# Altium PCB miniGatewayV3.PcbDoc
Units mm, origin at the board's own origin, x right, y up, seen from the top; angles counter-clockwise.
Board outline 152.4 x 101.6 mm, 2 copper layers (Top Layer, Bottom Layer); 17 components, 32 nets, 130 pads, 17 vias.
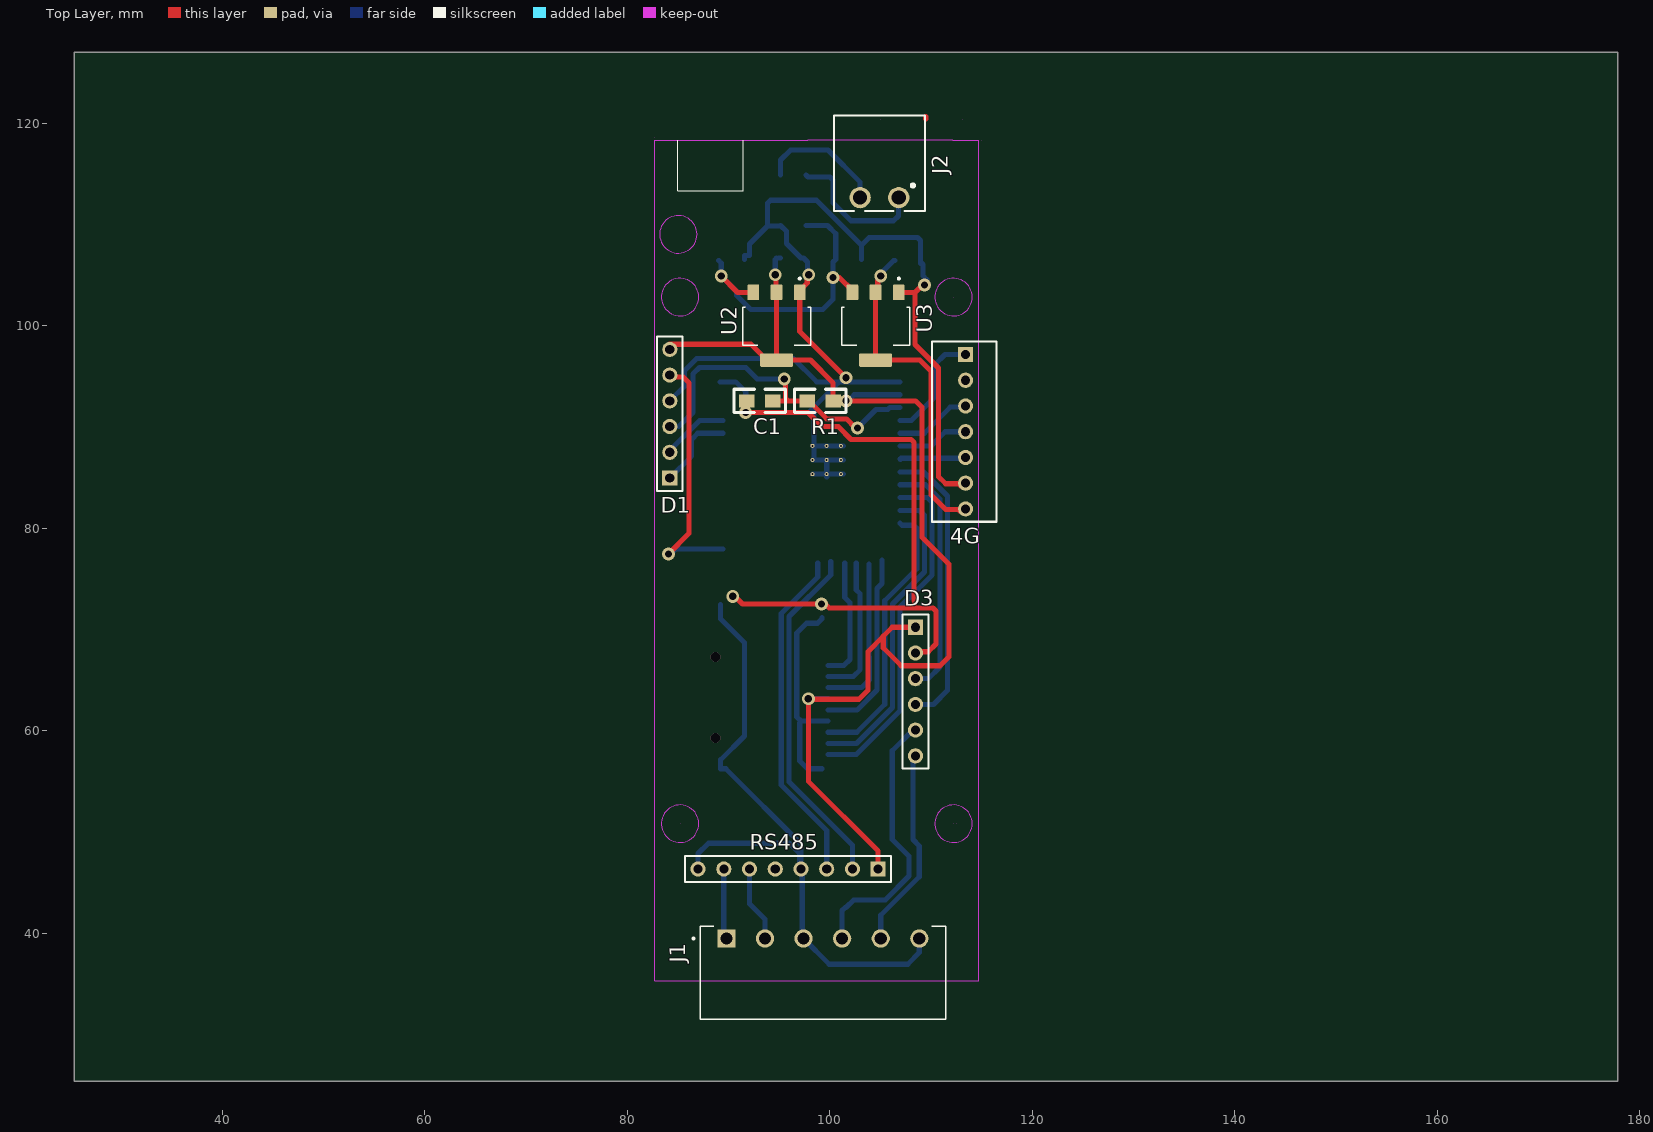
[diagram p0: Top Layer view]
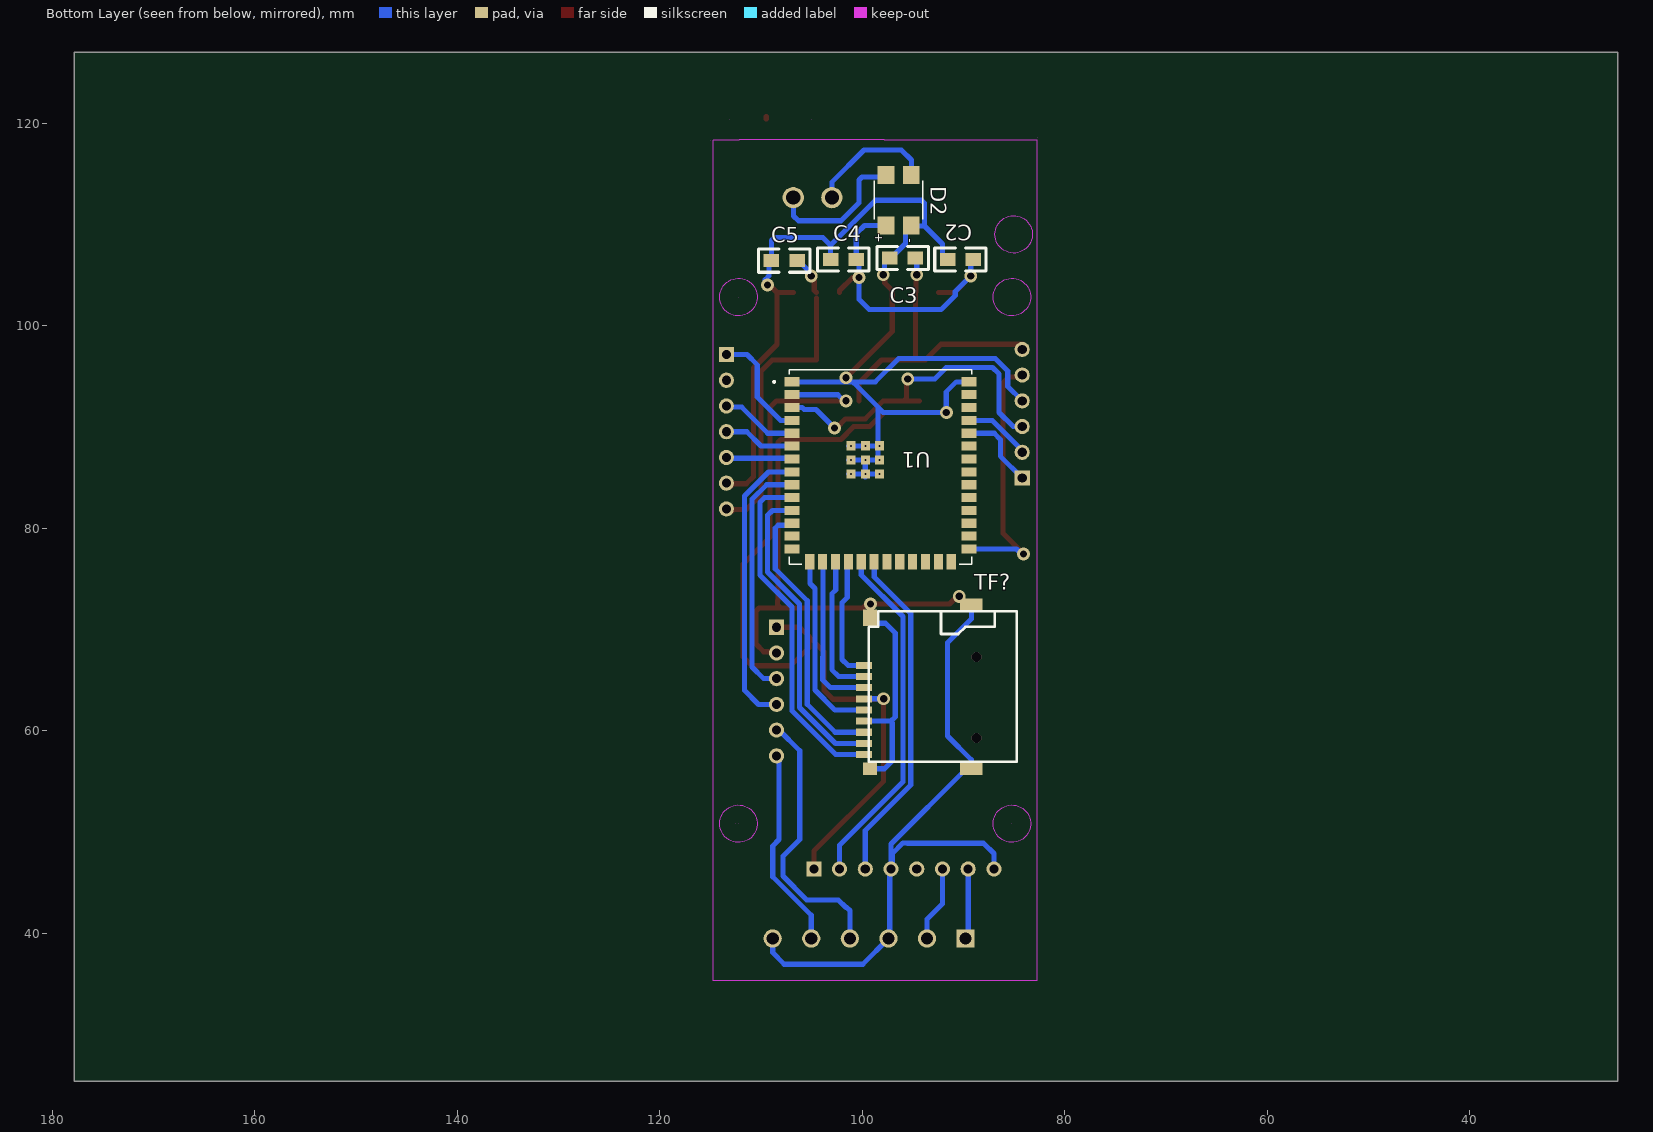
[diagram p1: Bottom Layer view, seen from below]

## Layer stack, top to bottom
Top Solder: solder mask 0.0102, Solder Resist, Dk 3.5
Top Layer: signal copper 0.0356
Dielectric 1: dielectric 0.32, FR-4, Dk 4.8
Bottom Layer: signal copper 0.0356
Bottom Solder: solder mask 0.0102, Solder Resist, Dk 3.5

## Board outline
25.4,25.4 177.8,25.4 177.8,127 25.4,127

## Design rules (kind name [scope] priority, off if disabled: settings)
Clearance [All] p1: gap=0.254 ignorepadtopadclearanceinfootprint=FALSE except(0: Arc-Hole Track-Hole SMDPad-Hole THPad-Hole Via-Hole Fill-Hole Poly-Hole Region-Hole Text-Hole)
PolygonConnect [All] p1: connectstyle=Relief reliefconductorwidth=0.254 reliefentries=4 polygonreliefangle="90 Angle" airgapwidth=0.254
RoutingVias [All] p1: holewidth=0.711 width=1.27 viastyle="Through Hole" minholewidth=0.711 minwidth=1.27 maxholewidth=0.711 maxwidth=1.27
SolderMaskExpansion [All] p1: expansion=0.102 istentingtop=FALSE
Width [All] p1: maxlimit=0.508 minlimit=0.508 preferedwidth=0.508
30 further rules are at their usual default settings.

## Components (designator, comment, footprint, x,y, rotation, side; value= is the part's Value field where it differs from the comment)
4G "DS1307模块" DS1307 113.411,97.155 r270 top
C1 "100pf" 0805 91.821,92.583 r180 top value=100pF
C2 "100pf" 0805 91.567,106.553 r0 bottom value=100pF
C3 "100pf" 0805 97.282,106.68 r0 bottom value=100pF
C4 "100pf" 0805 103.124,106.553 r0 bottom value=100pF
C5 "100pf" 0805 108.966,106.426 r0 bottom value=100pF
D1 "2.54DIP6" HDR1X6 84.201,84.963 r90 top
D2 "HD06-T" DQ 96.393,112.268 r90 bottom
D3 "2.54DIP6" HDR1X6 108.458,70.231 r270 top
J1 "1803316" 6PIN3.81mm 98.806,38.1 r0 top
J2 "691322310002" 691322310002 104.902,112.649 r180 top
R1 "10K" 0805 100.33,92.583 r0 top
RS485 "Header 8" HDR1X8 104.775,46.355 r180 top
TF? "TF_CARD" TF_SOCKET-1 96.422,58.462 r90 bottom
U1 "ESP32-S3-WROOM-1U" ESP32-S3-WROOM 99.716,86.689 r180 bottom
U2 "AMS1117-3.3" SOT229P700X180-4N 94.742,99.949 r270 top
U3 "AMS1117-5" SOT229P700X180-4N 104.521,99.949 r270 top

## Footprints (in the part's own frame and the unit in brackets; to place one, negate y for a bottom-side part, rotate by r counter-clockwise, add the part's x,y. Pads: shape width x height; smd on the part's side, far side on the other; paste and mask are expansions set on the pad)
6PIN3.81mm [mm]
  rect 1.8x1.8 hole 1.2: 1(-9.017,1.397)
  round 1.8 hole 1.2: 2(-5.207,1.397) 3(-1.397,1.397) 4(2.413,1.397) 5(6.223,1.397) 6(10.033,1.397)
  silkscreen extent -12.37,-6.6 12.63,2.6
0805 [mil]
  rect 60x50 smd: 1(0,0) 2(-100,0)
  silkscreen extent -150,-45 50,45
691322310002 [mm]
  round 2.1 hole 1.4: 1(-1.905,0) 2(1.905,0)
  silkscreen extent -4.5,-8.1 4.5,1.3
DQ [mm]
  rect 1.8x1.65 smd: AC1(2.627,1.25) AC2(2.627,-1.25) NEG(-2.373,-1.25) POS(-2.373,1.25)
  silkscreen extent -1.77,-2.39 2.03,2.39, body extent -3.27,-2.35 3.53,2.35, height 3
DS1307 [mm] "Connector; Header; 7 Position"
  rect 1.5x1.5 hole 0.9: 1(0,0)
  round 1.5 hole 0.9: 2(2.54,0) 3(5.08,0) 4(7.62,0) 5(10.16,0) 6(12.7,0) 7(15.24,0)
  silkscreen extent -1.27,-3.3 16.51,3.05
ESP32-S3-WROOM [mm]
  rect 1.5x0.9 smd: 1(-7.226,7.775) 2(-7.226,6.505) 3(-7.226,5.235) 4(-7.226,3.965) 5(-7.226,2.695) 6(-7.226,1.425) 7(-7.226,0.155) 8(-7.226,-1.115) 9(-7.226,-2.385) 10(-7.226,-3.655) 11(-7.226,-4.925) 12(-7.226,-6.195) 13(-7.226,-7.465) 14(-7.226,-8.735) 27(10.274,-8.735) 28(10.274,-7.465) 29(10.274,-6.195) 30(10.274,-4.925) 31(10.274,-3.655) 32(10.274,-2.385) 33(10.274,-1.115) 34(10.274,0.155) 35(10.274,1.425) 36(10.274,2.695) 37(10.274,3.965) 38(10.274,5.235) 39(10.274,6.505) 40(10.274,7.775)
  rect 0.9x1.5 smd: 15(-5.461,-9.985) 16(-4.191,-9.985) 17(-2.921,-9.985) 18(-1.651,-9.985) 19(-0.381,-9.985) 20(0.889,-9.985) 21(2.159,-9.985) 22(3.429,-9.985) 23(4.699,-9.985) 24(5.969,-9.985) 25(7.239,-9.985) 26(8.509,-9.985)
  rect 0.9x0.9 smd: 41_1(-1.376,1.455) 41_2(0.024,1.455) 41_3(1.424,1.455) 41_4(-1.376,0.055) 41_5(0.024,0.055) 41_6(1.424,0.055) 41_7(-1.376,-1.345) 41_8(0.024,-1.345) 41_9(1.424,-1.345)
  round 0.4 hole 0.2 mask+0: 41_10(-1.376,1.455) 41_11(0.024,1.455) 41_12(-1.376,0.055) 41_13(0.024,0.055) 41_14(1.424,1.455) 41_16(1.424,0.055) 41_17(-1.376,-1.345) 41_18(0.024,-1.345) 41_19(1.424,-1.345)
  silkscreen extent -9.08,-10.24 10.52,8.96
HDR1X6 [mm] "Connector; Header; 6 Position"
  rect 1.5x1.5 hole 0.9: 1(0,0)
  round 1.5 hole 0.9: 2(2.54,0) 3(5.08,0) 4(7.62,0) 5(10.16,0) 6(12.7,0)
  silkscreen extent -1.27,-1.27 13.97,1.27
HDR1X8 [mm] "Connector; Header; 8 Position"
  rect 1.5x1.5 hole 0.9: 1(0,0)
  round 1.5 hole 0.9: 2(2.54,0) 3(5.08,0) 4(7.62,0) 5(10.16,0) 6(12.7,0) 7(15.24,0) 8(17.78,0)
  silkscreen extent -1.27,-1.27 19.05,1.27
SOT229P700X180-4N [mm]
  rrect15% 1.539x1.147 smd: 1(-3.345,2.29)
  rrect15% 1.539x1.159 smd: 2(-3.345,0) 3(-3.345,-2.29)
  rrect15% 1.31x3.24 smd: 4(3.345,0)
  silkscreen extent -4.8,-3.36 1.86,3.36, body extent -3.5,-3.25 3.5,3.25, height 1.8
TF_SOCKET-1 [mm]
  rect 0.7x1.6 smd: 1(8,3.4) 2(6.9,3.4) 3(5.8,3.4) 4(4.7,3.4) 5(3.6,3.4) 6(2.5,3.4) 7(1.4,3.4) 8(0.3,3.4) 9(-0.8,3.4)
  rect 1.6x1.4 smd: 10(12.7,2.8)
  rect 1.2x2.2 smd: 11(14,-7.2) 13(-2.2,-7.2)
  rect 1.2x1.4 smd: 12(-2.2,2.8)
  silkscreen extent -1.52,-11.68 13.33,2.92, body extent -2.22,-11.56 13.78,3.69, height 1.85

## Part data
4G: library part "Header 7", "Header, 7-Pin", LatestRevisionDate=17-Jul-2002, LatestRevisionNote="Re-released for DXP Platform.", Publisher="Altium Limited"
C1 C2 C3 C4 C5: library part "Cap Semi", "Capacitor (Semiconductor SIM Model)", LatestRevisionDate=29-May-2009, LatestRevisionNote="IPC-7351 Footprint Added.", PackageDescription="Chip Capacitor", PackageReference=C1206, Published=8-Jun-2000, Publisher="Altium Limited"
D1 D3: library part "Header 6", "Header, 6-Pin", LatestRevisionDate=17-Jul-2002, LatestRevisionNote="Re-released for DXP Platform.", Publisher="Altium Limited"
D2: "KÃ¶prÃ¼ DoÄŸrultucu Tek FazlÄ± Standart 600 V YÃ¼zey MontajlÄ± 4-MiniDIP", Package="SMD-4 Diodes Inc.", Availability="In Stock", Check_prices=https://www.snapeda.com/parts/HD06-T/Diodes+Inc./view-part/?ref=eda, MF="Diodes Inc.", MP=HD06-T, Price=None, Purchase-URL=https://pricing.snapeda.com/search/part/HD06-T/?ref=eda, SnapEDA_Link=https://www.snapeda.com/parts/HD06-T/Diodes+Inc./view-part/?ref=snap
J1: "6 Position Terminal Block Header, Male Pins, Shrouded _4 Side_ 0.150 _3.81mm_ 90Â°, Right Angle Through Hole", Package=None, Availability=Unavailable, MF="Phoenix Contact", MP=1803316, Price=None, SnapEDA_Link=https://www.snapeda.com/parts/1803316/Phoenix%20Contact/view-part/681506/?ref=snap
J2: "2 Position Terminal Block Header, Male Pins, Shrouded (4 Side) 0.150 (3.81mm) 90Â°, Right Angle - Through Hole", Package=None, Check_prices=https://www.snapeda.com/parts/691322310002/Wurth+Electronics+Inc./view-part/?ref=eda, MF="Wurth Electronics", MP=691322310002, SnapEDA_Link=https://www.snapeda.com/parts/691322310002/Wurth+Electronics+Inc./view-part/?ref=snap
R1: library part Res3, "Resistor", LatestRevisionDate=29-May-2009, LatestRevisionNote="IPC-7351 Footprint Added.", PackageDescription="Chip Resistor", PackageReference=J1-0603, Published=8-Jun-2000, Publisher="Altium Limited"
RS485: "Header, 8-Pin", LatestRevisionDate=17-Jul-2002, LatestRevisionNote="Re-released for DXP Platform.", Publisher="Altium Limited"
U1: "2.4 GHz Wi-Fi (802.11 b/g/n) and Bluetooth 5 (LE) module", Package=Package, Availability="Not in stock", Check_prices=https://www.snapeda.com/parts/ESP32-S3-WROOM-1U/Espressif+Systems/view-part/?ref=eda, MF="Espressif Systems", MP=ESP32-S3-WROOM-1U, Price=None, SnapEDA_Link=https://www.snapeda.com/parts/ESP32-S3-WROOM-1U/Espressif+Systems/view-part/?ref=snap
U2 U3: library part AMS1117, "1A LOW DROPOUT VOLTAGE REGULATOR SOT-223", Package="SOT-223 Seeed Technology", Availability="Not in stock", Check_prices=https://www.snapeda.com/parts/AMS1117/Advanced+Monolithic+Systems/view-part/?ref=eda, MF="Advanced Monolithic Systems", MP=AMS1117, Price=None, SnapEDA_Link=https://www.snapeda.com/parts/AMS1117/Advanced+Monolithic+Systems/view-part/?ref=snap

## Via types
v1: diameter 1.27, hole 0.711, Top Layer to Bottom Layer, 15 vias
v2: diameter 1, hole 1, Top Layer to Bottom Layer, 2 vias

## Nets (pads, with @x,y where several pads share a name; then routed paths per layer and width w, separated by ;. In a path a pad name is that pad's centre, name@x,y a point inside that pad or via, vN(x,y) a via of type N, cw(c..) or ccw(c..) an arc to the next point about the centre after c; other vN are vias at no path point)
4GRST: 4G.3 U1.5 | length 7.6
  Bottom Layer w0.508: U1.5@106.942,89.381 109.32,89.381 111.899,91.96 113.296,91.96 4G.3
4GRXD: 4G.4 U1.6 | length 7.1
  Bottom Layer w0.508: U1.6@106.942,88.111 109.982,88.111 111.406,89.535 4G.4
4GTXD: 4G.5 U1.7 | length 6.6
  Bottom Layer w0.508: U1.7@106.942,86.841 U1.7@106.992,86.791 ; U1.7 107.017,86.92 113.336,86.92 4G.5
12V+: D2.AC2 J2.2 | length 13.2
  Top Layer w0.508: J2.2@102.709,112.937 J2.2 J2.2@102.867,112.519
  Bottom Layer w0.508: D2.AC2 95.143,116.352 96.139,117.348 99.822,117.348 102.997,114.173 J2.2
12V-: D2.AC1 J2.1 | length 14.8
  Bottom Layer w0.508: D2.AC1 97.857,114.681 100.028,114.681 100.326,114.383 100.326,112.137 102.1,110.363 106.299,110.363 106.773,110.837 106.773,112.615 J2.1 J2.1@106.519,112.937
CANH: D3.5 J1.4 | length 26.7
  Bottom Layer w0.508: J1.4 101.219,42.247 101.517,42.545 101.6,42.545 102.362,43.307 105.475,43.307 107.823,45.655 107.823,47.625 106.172,49.276 106.172,58.039 D3.5@108.204,60.071
CANL: D3.6 J1.5 | length 19.9
  Bottom Layer w0.508: J1.5 105.029,41.783 108.839,45.593 108.839,48.641 108.204,49.276 D3.6@108.204,57.531
CRX: D3.4 U1.8 | length 28.9
  Bottom Layer w0.508: U1.8@106.942,85.571 109.243,85.571 111.633,83.181 111.633,64.008 110.236,62.611 D3.4 D3.4@108.204,62.611
CTX: D3.3 U1.9 | length 24.2
  Bottom Layer w0.508: U1.9@106.942,84.301 109.436,84.301 110.871,82.866 110.871,66.294 109.728,65.151 D3.3 D3.3@108.204,65.151
DTR: 4G.1 U1.4 | length 11
  Bottom Layer w0.508: U1.4@106.942,90.651 108.05,90.651 110.363,92.964 110.363,96.139 111.379,97.155 4G.1
EN: C1.2 D1.3 R1.2 U1.3 | length 33.3
  Top Layer w0.508: C1.2 95.885,92.583 ; v1(95.504,94.742) 95.631,94.615 95.631,92.837 95.885,92.583 ; v1(102.743,89.916) 102.545,89.916 101.656,90.805 99.695,90.805 97.917,92.583 R1.2 95.885,92.583
  Bottom Layer w0.508: D1.3 85.09,90.043 86.487,91.44 86.487,95.25 87.122,95.885 91.694,95.885 92.837,94.742 v1(95.504,94.742) ; v1(102.743,89.916) 104.552,91.725 105.73,91.725 105.929,91.924 U1.3
GND: 4G.6 C1.1 C2.1 C3.1 C4.1 C5.1 D1.4 D2.NEG D3.2 J1.3 J1.6 RS485.4 RS485.8 TF?.6 TF?.10 TF?.11 TF?.12 TF?.13 U1.1 U1.40 U1.41_1 U1.41_2 U1.41_3 U1.41_4 U1.41_5 U1.41_6 U1.41_7 U1.41_8 U1.41_9 U2.1 U3.1 | length 280.5
  Top Layer w0.508: v1(90.424,73.279) 90.63,73.279 91.392,72.517 v1(99.187,72.517) ; v1(91.694,91.44) 97.851,91.44 99.251,90.04 100.838,90.04 102.105,88.773 108.033,88.773 108.331,88.475 108.331,72.898 108.375,72.854 108.375,72.434 108.077,72.136 ; v1(97.917,105.029) 97.771,104.883 97.771,104.223 97.032,103.484 U2.1 97.032,99.437 v1(101.6,94.869) v1@101.6,94.615 ; v1@99.377,72.707 99.949,72.136 108.077,72.136 ; U3.1 108.422,103.294 ; D3.2@108.204,67.691 108.319,67.806 109.716,67.806 110.49,68.58 110.49,71.838 110.192,72.136 108.077,72.136 ; v1(109.347,104.013) 109.141,104.013 108.422,103.294 ; 4G.6@112.903,84.201 112.713,84.391 111.443,84.391 110.744,85.09 110.744,95.82 108.422,98.142 108.422,103.294
  Bottom Layer w0.508: D1.4 85.629,94.011 85.629,95.535 86.868,96.774 96.393,96.774 98.706,94.461 U1.1@106.942,94.461 ; RS485.8 86.995,47.879 88.011,48.895 95.504,48.895 95.548,48.939 95.968,48.939 97.04,47.867 97.04,46.47 RS485.4 ; U1.40@89.154,94.461 90.705,94.461 91.694,93.472 v1(91.694,91.44) 97.917,91.44 98.425,91.948 ; TF?.11 89.222,71.052 91.567,68.707 91.567,59.495 89.222,57.15 TF?.13 89.722,56.262 97.155,48.829 RS485.4 ; C2.1 91.567,106.934 92.075,106.934 92.075,108.077 93.853,109.855 ; 97.028,60.75 97.028,57.023 97.789,56.262 TF?.12 ; v1(97.917,105.029) 97.79,105.156 97.79,106.299 97.409,106.68 C3.1 97.155,106.68 95.714,108.121 95.714,109.324 D2.NEG 95.103,109.855 93.853,109.855 ; U1.41_9 U1.41_8 U1.41_8@99.695,85.344 ; U1.41_6@98.292,86.741 U1.41_5@99.695,86.741 ; U1.41_3@98.292,88.138 U1.41_3@98.425,88.138 ; U1.41_6@98.425,86.992 U1.41_3@98.425,88.138 ; 98.425,88.646 U1.41_3@98.425,88.138 ; 98.425,88.852 98.425,91.948 ; TF?.10 99.222,71.062 98.776,70.616 97.707,70.616 96.737,69.646 96.737,61.378 97.153,60.962 TF?.6 ; U1.41_8@99.695,85.087 U1.41_8@99.695,85.344 ; 100.838,94.361 98.425,91.948 ; U1.41_7@101.346,85.344 U1.41_7 U1.41_8@99.695,85.344 ; U1.41_4@101.346,86.741 U1.41_5@99.695,86.741 ; U1.41_1@101.346,88.138 U1.41_3@98.425,88.138 ; C4.1 103.124,107.95 ; J1.6 108.839,38.1 107.696,36.957 99.949,36.957 J1.3 97.282,39.624 97.282,46.228 RS485.4 ; v1@109.582,104.54 109.22,104.902 109.22,106.045 109.093,106.172 108.966,106.172 C5.1 108.966,108.414 108.668,108.712 103.886,108.712 103.124,107.95 ; 93.853,109.855 93.853,112.097 94.151,112.395 98.679,112.395 103.124,107.95 ; U1.41_8@99.695,85.344 U1.41_5@99.695,86.741
IO0: D1.5 U1.27 | length 25.5
  Top Layer w0.508: v1(84.074,77.47) 86.106,79.502 86.106,94.361 85.534,94.933 84.391,94.933 D1.5
  Bottom Layer w0.508: v1(84.074,77.47) 84.28,77.47 84.761,77.951 89.439,77.951 U1.27
NET: 4G.2
RS485A1: J1.1 RS485.7 | length 7
  Bottom Layer w0.508: RS485.7 89.535,39.751 J1.1
RS485B1: J1.2 RS485.6 | length 7.5
  Bottom Layer w0.508: RS485.6 92.075,42.926 93.599,41.402 J1.2
RX1: RS485.3 U1.20 | length 33.6
  Bottom Layer w0.508: U1.20@98.806,76.585 98.806,75.184 95.213,71.591 95.213,54.647 99.695,50.165 RS485.3
RXD0: D1.1 U1.36 | length 8
  Bottom Layer w0.508: D1.1 86.36,87.122 86.36,88.773 86.968,89.381 89.439,89.381 U1.36
SPI_CLK: TF?.5 U1.15 | length 18.7
  Bottom Layer w0.508: TF?.5 102.702,62.062 104.66,64.02 104.66,74.053 105.156,74.549 U1.15@105.156,76.842
SPI_SDCDN: TF?.9 U1.10 | length 34.2
  Bottom Layer w0.508: TF?.9 102.62,57.662 106.946,61.988 106.946,72.213 110.109,75.376 110.109,82.55 109.628,83.031 U1.10@106.942,83.031
SPI_SDCS: TF?.2 U1.17 | length 14.2
  Bottom Layer w0.508: TF?.2 102.319,65.362 102.997,66.04 102.997,73.533 102.616,73.914 U1.17@102.616,76.581
SPI_SDD1: TF?.8 U1.11 | length 30.7
  Bottom Layer w0.508: TF?.8 102.642,58.762 106.184,62.304 106.184,72.529 109.347,75.692 109.347,81.28 108.866,81.761 U1.11@106.942,81.761
SPI_SDD2: TF?.1 U1.18 | length 12.1
  Bottom Layer w0.508: TF?.1 101.387,66.462 101.981,67.056 101.981,72.644 101.473,73.152 U1.18@101.473,76.549
SPI_SDDI: TF?.3 U1.16 | length 15.8
  Bottom Layer w0.508: TF?.3 103.136,64.262 103.898,65.024 103.898,67.277 103.886,67.289 U1.16@103.886,76.454
SPI_SDDO: TF?.7 U1.12 | length 27.3
  Bottom Layer w0.508: TF?.7 102.665,59.862 105.422,62.619 105.422,72.845 108.585,76.008 108.585,80 108.287,80.298 107.138,80.298 U1.12
TX1: RS485.2 U1.19 | length 34.6
  Bottom Layer w0.508: U1.19 100.097,75.397 95.975,71.275 95.975,54.963 102.235,48.703 RS485.2
TXD0: D1.2 U1.37 | length 6.7
  Bottom Layer w0.508: D1.2 84.201,87.692 87.16,90.651 89.439,90.651 U1.37
USB_D+: U1.13
USB_D-: U1.14
VCC: C2.2 C4.2 D2.POS U2.3 U3.3 | length 30.8
  Top Layer w0.508: v1(89.283,104.904) 90.893,103.294 U2.3 ; v1@100.584,104.775 100.94,104.775 102.231,103.484 U3.3
  Bottom Layer w0.508: C2.2@89.029,106.428 89.283,106.174 v1(89.283,104.904) 90.815,103.372 90.815,102.987 92.202,101.6 99.314,101.6 100.33,102.616 v1(100.33,104.775) 100.33,106.299 C4.2 100.584,109.093 99.782,109.895 D2.POS
VCC50: 4G.7 C5.2 U3.2 U3.4 | length 31.9
  Top Layer w0.508: U3.2@104.521,102.75 U3.4 108.882,96.604 109.982,95.504 109.982,83.312 111.443,81.851 112.713,81.851 4G.7@112.903,81.661 ; U3.2 104.732,103.505 104.732,104.399 105.029,104.696 v1(105.029,104.902)
  Bottom Layer w0.508: v1(105.029,104.902) 105.175,105.048 105.175,105.302 106.299,106.426 C5.2
VDD33: C3.2 D1.6 D3.1 R1.1 RS485.1 TF?.4 U1.2 U2.2 U2.4 | length 114.7
  Top Layer w0.508: D1.6@84.201,98.171 92.21,98.171 93.777,96.604 U2.4 ; v1(94.615,105.029) 94.678,104.965 94.678,103.357 U2.2 U2.4 ; R1.1 100.33,94.361 98.087,96.604 U2.4 ; v1(101.6,92.583) 108.458,92.583 109.093,91.948 109.093,79.121 111.76,76.454 111.76,67.31 110.883,66.433 107.049,66.433 105.283,68.199 105.283,69.342 ; RS485.1 104.775,48.133 97.88,55.028 v1(97.88,63.162) 97.923,63.119 102.87,63.119 103.759,64.008 103.759,67.818 105.283,69.342 ; D3.1@108.204,70.231 106.172,70.231 105.283,69.342
  Bottom Layer w0.508: v1(94.615,105.029) 94.615,106.553 C3.2 ; C3.2@94.996,106.68 C3.2@95.123,106.68 ; v1(97.88,63.162) TF?.4 ; v1(101.6,92.583) 101.806,92.583 102.414,93.191 U1.2@106.942,93.191
pads on no net: RS485.5 U1.21 U1.22 U1.23 U1.24 U1.25 U1.26 U1.28 U1.29 U1.30 U1.31 U1.32 U1.33 U1.34 U1.35 U1.38 U1.39 U1.41_10 U1.41_11 U1.41_12 U1.41_13 U1.41_14 U1.41_16 U1.41_17 U1.41_18 U1.41_19
copper on no net: | length 0.3
  Top Layer w0.508: 109.474,120.396 109.474,120.65
  other v2: 88.713,59.3 88.713,67.3

## Keep-outs
Keep-Out Layer:
  circle w0.013: c85.04,109.022 r1.85
  circle w0.006: c86.599,108.027 r0.003
  circle w0.006: c84.348,49.201 r0.003
  circle w0.006: c114.006,103.322 r0.003
  circle w0.006: c86.781,101.836 r0.003
  circle w0.006: c113.122,120.331 r0.003
  circle w0.006: c115.022,118.331 r0.003
  circle w0.006: c82.722,118.631 r0.003
  circle w0.006: c104.972,120.331 r0.003
  circle w0.006: c82.722,118.331 r0.003
  circle w0.006: c112.222,50.831 r0.003
  circle w0.006: c85.222,50.831 r0.003
  circle w0.006: c114.722,118.331 r0.003
  circle w0.006: c112.222,102.831 r0.003
  circle w0.006: c114.722,35.331 r0.003
  circle w0.006: c112.522,50.831 r0.003
  circle w0.006: c112.222,102.831 r0.003
  circle w0.006: c112.222,50.831 r0.003
  circle w0.006: c114.722,118.331 r0.003
  circle w0.006: c82.722,118.331 r0.003
  circle w0.013: c112.222,102.831 r1.85
  circle w0.013: c85.222,102.831 r1.85
  circle w0.013: c85.222,50.831 r1.85
  circle w0.013: c112.222,50.831 r1.85
  lines w0.013: 84.472,118.331 82.722,118.331 ; 85.852,35.306 111.633,35.306 ; 85.972,35.331 82.722,35.331 82.722,118.331 ; 97.822,118.331 91.472,118.331 84.972,118.331 82.722,118.331 ; 97.841,118.364 112.141,118.364 ; 111.472,35.331 114.722,35.331 114.722,118.331 ; 112.122,118.331 114.722,118.331 ; 113.122,118.331 114.722,118.331

## Silkscreen, mask and mechanical layers (free items; w line width, h text height)
Top Overlay:
  lines w0.013: 84.972,118.331 84.972,113.331 91.472,113.331 91.472,118.331

## Text inside footprints (layer, text, board x,y; h text height)
D2: Bottom Overlay "+" at 98.044,108.204 h0.81 r270; Bottom Overlay "-" at 94.996,108.204 h0.81 r270; Mechanical 13 "+" at 98.044,108.204 h0.81 r270; Mechanical 13 "-" at 94.996,108.204 h0.81 r270